# EAGLE board SUPERHOOP (EAGLE 6.5.0)
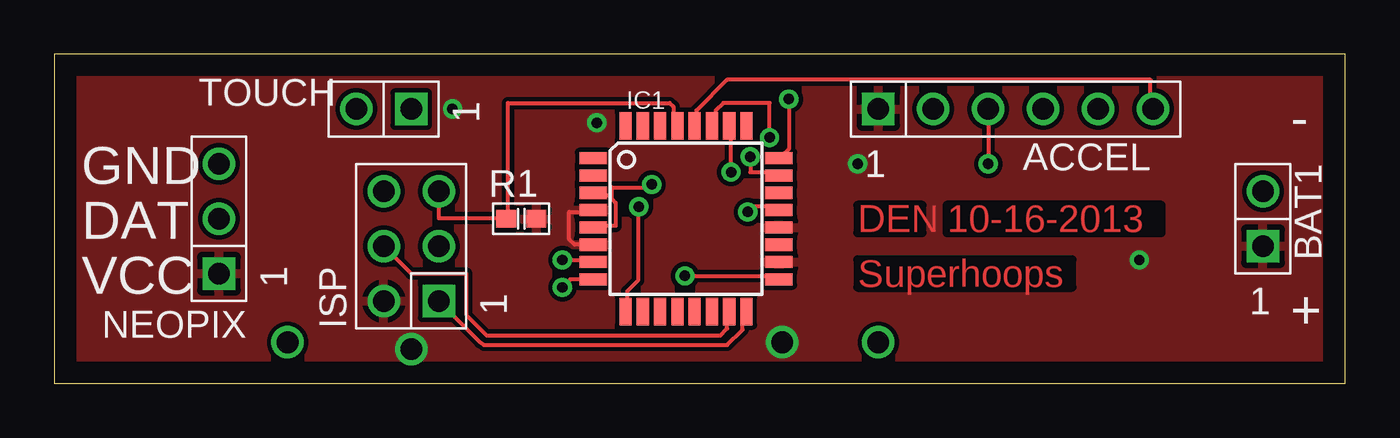
[diagram p0: board, top side]
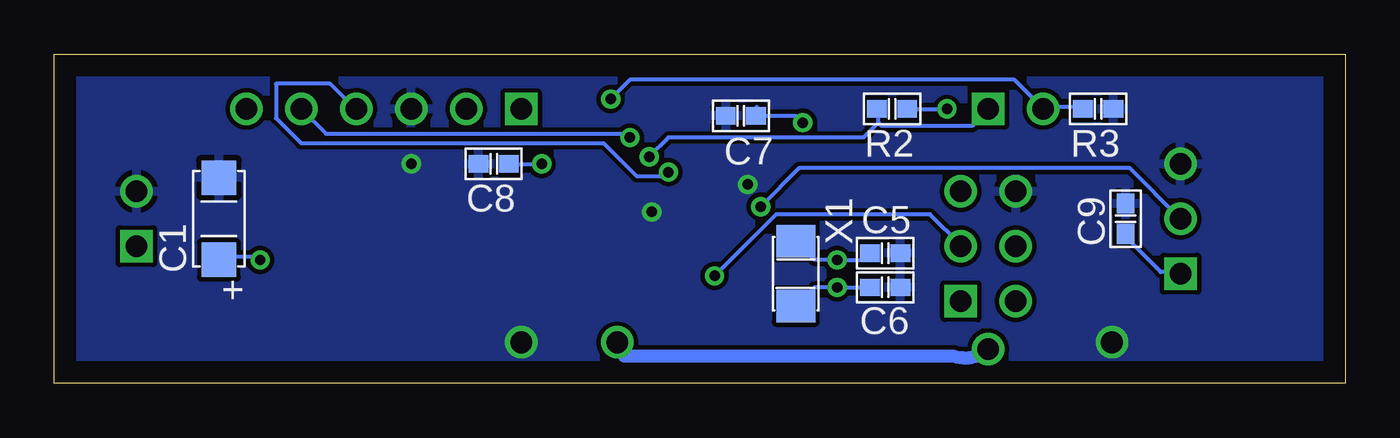
[diagram p1: board, bottom side, seen from below]

Size 59.69 x 15.24 mm. Coordinates in mm from the lower left corner, seen from the top.
Outline: 0,0 59.69,0 59.69,15.24 0,15.24 0,0
Copper layers (1*16): Top 0.035mm / dielectric 1.5mm / Bottom 0.035mm
Design rules "default *": minimum track width 7mil, minimum drill 19mil, track to track 8mil, track to pad 8mil, pad to pad 8mil, via to via 8mil, smd to smd 8mil, copper to edge 40mil, drill to drill 8mil, minimum pad ring 10mil, minimum via ring 8mil, stop-mask expansion 4mil, vias tented up to drill 0mil, thermal gap 10mil

## Footprints (pad centres in the part's own frame; a part is rotated, then mirrored left to right if it is on the bottom)
HEADER_6X1_2.54 = drill 1 pad 1.422 square: 1 -6.35,0 | drill 1 pad 1.422: 2 -3.81,0; 3 -1.27,0; 4 1.27,0; 5 3.81,0; 6 6.35,0
HEADER_2X1_2.54 = drill 1 pad 1.422 square: 1 0,-1.27 | drill 1 pad 1.422: 2 0,1.27
CAP_POL_1206 = smd 1.6 x 1.6: N 1.9,0; P -1.9,0
SMD_0603 = smd 0.914 x 0.8: P$1 -0.701,0; P$2 0.701,0
TQFP32-08 = smd 1.27 x 0.559: 1 -4.293,2.8; 2 -4.293,2; 3 -4.293,1.2; 4 -4.293,0.4; 5 -4.293,-0.4; 6 -4.293,-1.2; 7 -4.293,-2; 8 -4.293,-2.8; 17 4.293,-2.8; 18 4.293,-2; 19 4.293,-1.2; 20 4.293,-0.4; 21 4.293,0.4; 22 4.293,1.2; 23 4.293,2; 24 4.293,2.8 | smd 0.559 x 1.27: 9 -2.8,-4.293; 10 -2,-4.293; 11 -1.2,-4.293; 12 -0.4,-4.293; 13 0.4,-4.293; 14 1.2,-4.293; 15 2,-4.293; 16 2.8,-4.293; 25 2.8,4.293; 26 2,4.293; 27 1.2,4.293; 28 0.4,4.293; 29 -0.4,4.293; 30 -1.2,4.293; 31 -2,4.293; 32 -2.8,4.293
HEADER_3X2_2.54 = drill 1 pad 1.422 square: 1 -2.54,-1.27 | drill 1 pad 1.422: 2 -2.54,1.27; 3 0,-1.27; 4 0,1.27; 5 2.54,-1.27; 6 2.54,1.27
HEADER_3X1_2.54 = drill 1 pad 1.422 square: 1 -2.54,0 | drill 1 pad 1.422: 2 0,0; 3 2.54,0
CRYSTAL_3.2X1.5 = smd 1.5 x 1.8: P$1 -1.5,0; P$2 1.5,0

## Placement (x,y rotation side)
ACCEL  ADXL335_BBOARD_V2  [HEADER_6X1_2.54]  44.45,12.7 0 top
BAT1  Battery_lithium 3.7v (3x)  [HEADER_2X1_2.54]  55.88,7.62 0 top
C1  10uF  [CAP_POL_1206]  52.07,7.62 90 bottom
C5  22pF  [SMD_0603]  21.27,6.03 180 bottom
C6  22pF  [SMD_0603]  21.27,4.45 0 bottom
C7  100nF  [SMD_0603]  27.94,12.38 180 bottom
C8  100nf  [SMD_0603]  39.37,10.16 0 bottom
C9  100nF  [SMD_0603]  10.16,7.62 90 bottom
IC1  MEGA8-AI  [TQFP32-08]  29.21,7.62 0 top
ISP  ISP-AVR_6P  [HEADER_3X2_2.54]  16.51,6.35 90 top
NEOPIX  LED_STRING_OUTPUT  [HEADER_3X1_2.54]  7.62,7.62 90 top
R1  10k  [SMD_0603]  21.59,7.62 0 top
R2  460k  [SMD_0603]  20.95,12.7 0 bottom
R3  460k  [SMD_0603]  11.43,12.7 180 bottom
TOUCH  TOUCH_INPUT  [HEADER_2X1_2.54]  15.24,12.7 90 top
X1  16mhz  [CRYSTAL_3.2X1.5]  25.4,5.08 270 bottom

## Library data of the parts
ACCEL BAT1 C1 C5-C9 ISP NEOPIX R1-R3 TOUCH X1 = daneagle_db
IC1 = atmel; MPN: ATMEGA8-16AU; OC_FARNELL: 9171371; OC_NEWARK: 73M8863

## Nets
DOUT: IC1.9 NEOPIX.2
GND: ACCEL.3 BAT1.2 C1.N C5.P$1 C6.P$2 C7.P$2 C8.P$1 C9.P$2 IC1.3 IC1.5 IC1.21 ISP.6 NEOPIX.3 R3.P$1
MISO: IC1.16 ISP.1
MOSI: IC1.15 ISP.4
RST: IC1.29 ISP.5 R1.P$1
SCK: IC1.17 ISP.3
TOUCHA: IC1.23 R2.P$1 TOUCH.1
TOUCHB: IC1.24 R3.P$2 TOUCH.2
VCC: ACCEL.1 BAT1.1 C1.P C7.P$1 C8.P$2 C9.P$1 IC1.4 IC1.6 IC1.18 IC1.20 ISP.2 NEOPIX.1 R1.P$2 R2.P$2
XOUT: ACCEL.6 IC1.28
XTAL1: C5.P$2 IC1.7 X1.P$1
XTAL2: C6.P$1 IC1.8 X1.P$2
YOUT: ACCEL.5 IC1.27
ZOUT: ACCEL.4 IC1.26

## Tracks (layer width: path | path; a pad name or v marks a point on that pad's centre or on a via)
DOUT  (via drill 0.48)
  Top 0.178: v27.03,8.18 26.99,7.94 26.99,4.76 26.49,4.27 26.49,3.38 IC1.9
  Bottom 0.178: v27.03,8.18 25.25,9.96 9.96,9.96 NEOPIX.2
GND  (via drill 0.48, 1)
  Top 0.178: 24.89,7.29 IC1.5 25.07,7.29 25.96,7.29 25.96,8.36 25.78,8.53 | 25.78,8.53 25.6,8.71 25.07,8.71 IC1.3 | 25.78,8.53 25.78,9.07 27.48,9.07 v27.62,9.21 | 33.6,8.18 IC1.21 33.43,8.18 32.31,8.18 v32.07,7.94 | ACCEL.3 v43.18,10.16
  other vias: 10.79,1.91 38.1,1.91
  pour Bottom: 0,15.24 0,0 59.69,0 59.69,15.24
MISO
  Top 0.178: IC1.16 32,3.2 31.83,3.02 31.83,2.49 31.11,1.78 19.88,1.78 19.68,1.91 ISP.1
MOSI
  Top 0.178: ISP.4 16.51,5.08 19.05,5.08 19.05,3.17 20,2.22 30.8,2.22 31.11,2.54 31.11,3.2 IC1.15
RST
  Top 0.178: ISP.5 17.78,7.64 20.8,7.64 R1.P$1 20.98,7.64 20.98,12.98 28.45,12.98 28.63,12.8 28.63,12.09 IC1.29
SCK  (via drill 0.48)
  Top 0.178: v29.16,4.98 33.43,4.98 IC1.17
  Bottom 0.178: v29.16,4.98 26.31,7.82 19.2,7.82 17.78,6.4 ISP.3
TOUCHA  (via drill 0.48)
  Top 0.178: v32.18,10.49 32.18,9.78 33.43,9.78 IC1.23
  Bottom 0.178: TOUCH.1 16.54,12.62 17.25,11.91 21.44,11.91 21.59,12.06 | v32.18,10.49 31.29,11.38 22.28,11.38 21.59,12.06 | 21.59,12.06 21.59,12.63 R2.P$1
TOUCHB  (via drill 0.48)
  Top 0.178: v33.96,13.16 33.96,10.85 33.6,10.49 IC1.24
  Bottom 0.178: R3.P$2 12.27,12.8 13.87,12.8 TOUCH.2 14.05,12.8 15.29,14.05 33.07,14.05 v33.96,13.16
VCC  (via drill 0.48, 1)
  Top 0.178: IC1.6 24.06,6.42 23.81,6.67 23.81,7.94 24.84,7.94 IC1.4
  Bottom 0.178: 27.2,12.8 C7.P$1 | C9.P$1 10.13,6.76 8.53,5.16 7.64,5.16 NEOPIX.1 | 27.38,12.62 C7.P$1 | C8.P$2 v37.15,10.16 | C1.P 52.09,5.74 52.09,5.87 C1.P 51.92,5.87 50.32,5.87 v50.16,5.71 | R2.P$2 v18.41,12.7 | C7.P$1 25.4,12.38 v25.08,12.06
  Bottom 0.61: v33.66,1.91 arc60 33.34,1.27 18.1,1.27 arc-60 v16.51,1.59
  pour Top: 0,15.24 0,0 59.69,0 59.69,15.24
XOUT
  Top 0.178: IC1.28 29.69,11.91 29.69,12.62 31.11,14.05 50.67,14.05 50.67,12.8 ACCEL.6
XTAL1  (via drill 0.48)
  Top 0.178: IC1.7 24.89,5.69 23.52,5.69 v23.5,5.71
  Bottom 0.178: X1.P$1 24.54,5.71 v23.5,5.71 22.29,5.71 C5.P$2
XTAL2  (via drill 0.48)
  Top 0.178: IC1.8 23.87,4.82 v23.5,4.45
  Bottom 0.178: X1.P$2 24.54,4.45 v23.5,4.45 C6.P$1
YOUT  (via drill 0.48)
  Top 0.178: v33.07,11.38 33.07,12.98 30.94,12.98 30.58,12.62 30.58,11.91 IC1.27
  Bottom 0.178: v33.07,11.38 33.25,11.56 47.12,11.56 ACCEL.5
ZOUT  (via drill 0.48)
  Top 0.178: v31.29,9.78 31.29,11.91 IC1.26
  Bottom 0.178: v31.29,9.78 31.47,9.6 32.78,9.6 34.29,11.11 48.26,11.11 49.43,12.27 49.43,13.87 46.94,13.87 45.87,12.8 ACCEL.4

## Text on the board
Top: DEN | 10-16-2013 | Superhoops
tPlace: - | GND | DAT | VCC | +